# Altium PCB P10_ESP32.PcbDoc
Units mm, origin at the board's own origin, x right, y up, seen from the top; angles counter-clockwise.
Board outline 91.31 x 42.29 mm, 2 copper layers (Top Layer, Bottom Layer); 56 components, 39 nets, 174 pads, 40 vias.
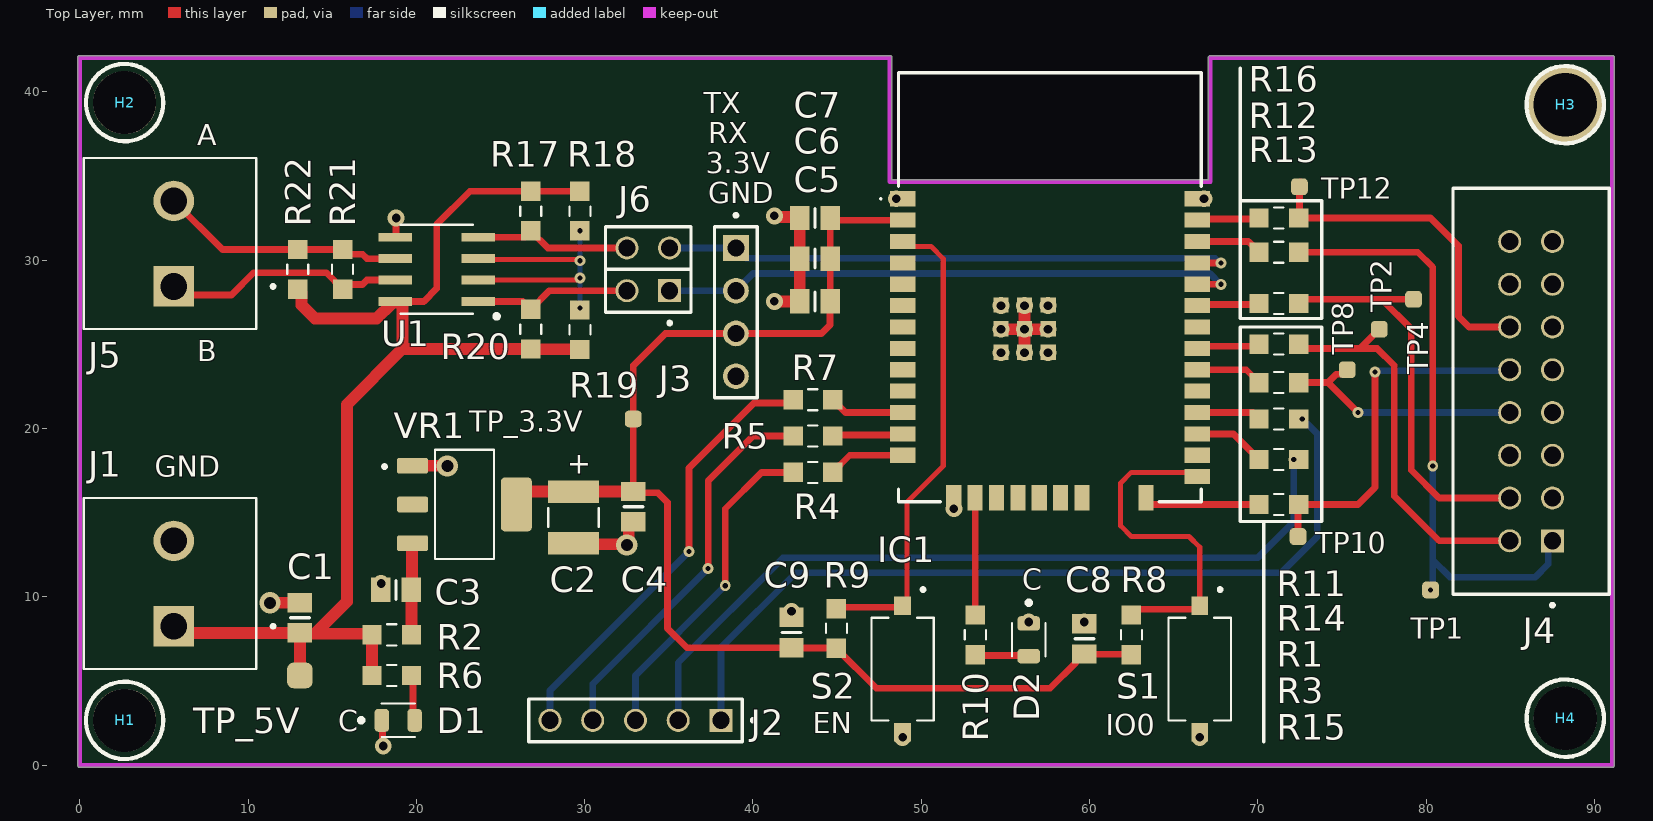
[diagram p0: Top Layer view]
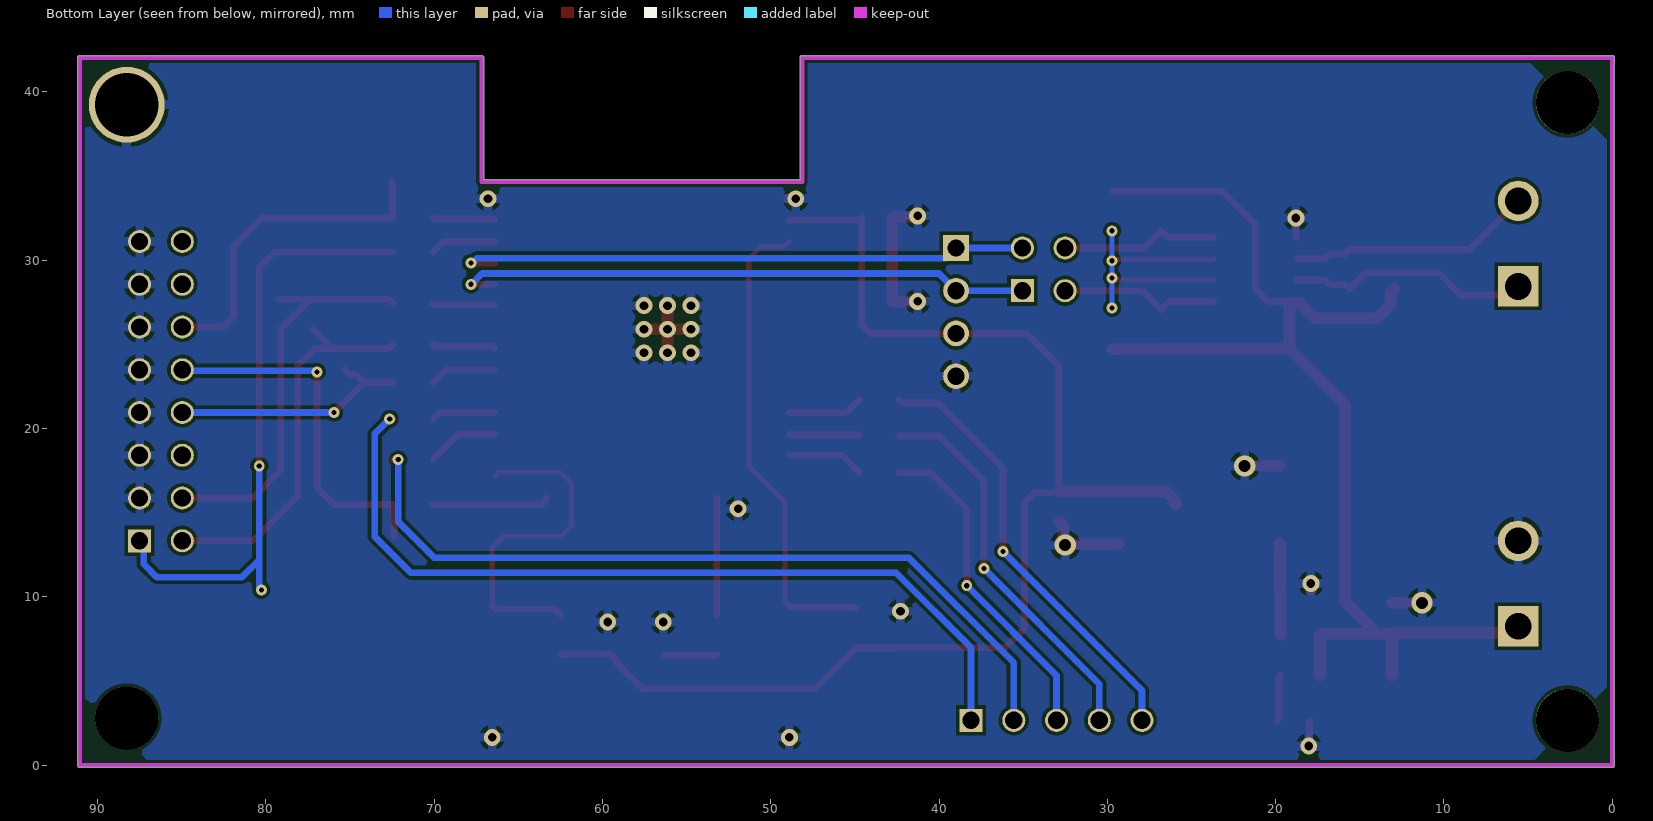
[diagram p1: Bottom Layer view, seen from below]
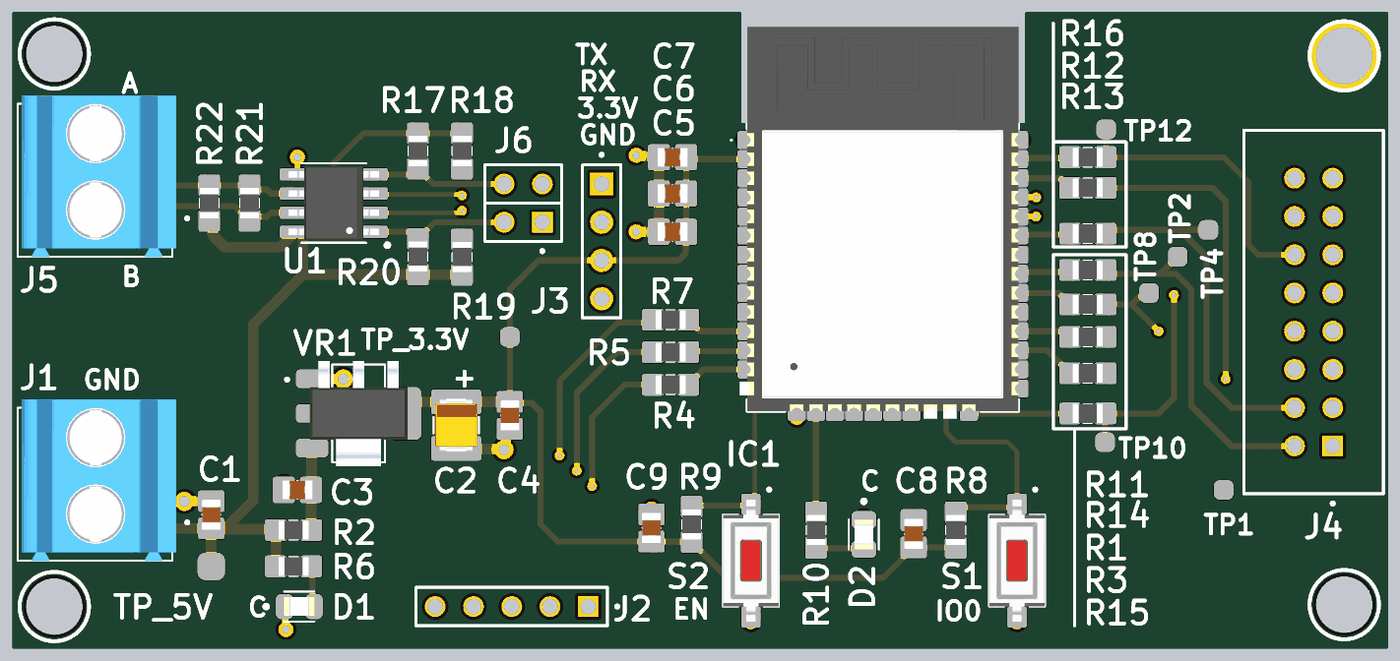
[diagram p2: 3D render of the assembled board from above, using the file's embedded part models]

## Layer stack, top to bottom
Top Solder: solder mask 0.0102, Solder Resist, Dk 3.5
Top Layer: signal copper 0.0356
Dielectric 1: dielectric 0.32, FR-4, Dk 4.8
Bottom Layer: signal copper 0.0356
Bottom Solder: solder mask 0.0102, Solder Resist, Dk 3.5

## Board outline
-0.125,0 -0.125,42.037 cw(c0,42.037) 0,42.162 48.133,42.162 cw(c48.133,42.037) 48.258,42.037 48.258,34.796 67.058,34.796 67.058,42.037 cw(c67.183,42.037) 67.183,42.162 91.059,42.162 cw(c91.059,42.037) 91.184,42.037 91.184,0 cw(c91.059,0) 91.059,-0.125 0,-0.125 cw(c0,0)

## Design rules (kind name [scope] priority, off if disabled: settings)
Clearance [All] p1: gap=0.2 ignorepadtopadclearanceinfootprint=FALSE
HoleSize [All] p1: absolutevalues=TRUE maxlimit=5.54 minlimit=0.25 maxpercent=80.000 minpercent=20.000
MinimumSolderMaskSliver [All] p1: minsoldermaskwidth=0.001
PasteMaskExpansion [All] p1: expansion=0.15
PlaneConnect [All] p1: planeconnectstyle=Relief reliefexpansion=0.508 reliefentries=4 reliefconductorwidth=0.54 reliefairgap=0.254
PolygonConnect [All] p1: connectstyle=Relief reliefconductorwidth=0.54 reliefentries=4 polygonreliefangle="90 Angle" airgapwidth=0.254
RoutingVias [All] p1: holewidth=0.711 width=1.27 viastyle="Through Hole" minholewidth=0.311 minwidth=0.627 maxholewidth=4.511 maxwidth=5
SilkToSilkClearance [All] p1: silktosilkclearance=0.025
SilkToSolderMaskClearance [IsPad] p1: minsilkscreentomaskgap=-0.25 clearancetoexposedcopper=TRUE
SolderMaskExpansion [All] p1: expansion=0.2 istentingtop=FALSE
SupplyNets "Schematic Supply Nets_2" [InNet('+3.3v')] p1: voltage=0.000
SupplyNets "Schematic Supply Nets_1" [InNet('GND')] p2: voltage=0.000
SupplyNets "Schematic Supply Nets" [InNet('+5')] p3: voltage=0.000
Width [All] p1: maxlimit=0.7 minlimit=0.3 preferedwidth=0.4
24 further rules are at their usual default settings.

## Classes and differential pairs
component class P10_ESP32: C1 C2 C3 C4 C5 C6 C7 C8 C9 D1 D2 IC1 J1 J2 J3 R1 R2 R3 R4 R5 R6 R7 R8 R9 R10 S1 S2 VR1
component class P10_ESP32_1: H1 H2 H3 H4 J4 J5 J6 R11 R12 R13 R14 R15 R16 R17 R18 R19 R20 R21 R22 TP1 TP2 TP10 TP12 TP_3.3V TP_5V U1

## Components (designator, comment, footprint, x,y, rotation, side; value= is the part's Value field where it differs from the comment)
C1 "CAP CER 10uF/50V 5% 0805" "CAP CER 0.1uF/50V 5%" 13.081,8.763 r270 top
C2 "TANT CAP 10uF/16V 5% 3528(B)" "TANT CAP 3528(B)" 29.337,14.716 r270 top
C3 "CAP CER 10uF/50V 5% 0805" "CAP CER 0.1uF/50V 5%" 18.796,10.414 r0 top
C4 "CAP CER 0.1uF/50V 5% 0805" "CAP CER 0.1uF/50V 5%" 32.893,15.367 r90 top
C5 "CAP CER 10uF/50V 5% 0805" "CAP CER 0.1uF/50V 5%" 43.688,27.559 r0 top
C6 "CAP CER 0.1uF/50V 5% 0805" "CAP CER 0.1uF/50V 5%" 43.688,30.099 r0 top
C7 "CAP CER 0.1uF/50V 5% 0805" "CAP CER 0.1uF/50V 5%" 43.688,32.512 r0 top
C8 "CAP CER 0.1uF/50V 5% 0805" "CAP CER 0.1uF/50V 5%" 59.69,7.504 r270 top
C9 "CAP CER 0.1uF/50V 5% 0805" "CAP CER 0.1uF/50V 5%" 42.291,7.885 r270 top
D1 "LED-0805" LED-0805 18.923,2.667 r0 top
D2 "LED-0805" LED-0805 56.388,7.452 r270 top
H1 "ScrewHole_3.75mmD" ScrewHole_3.75mmD#1 2.667,2.667 r0 top
H2 "ScrewHole_3.75mmD" ScrewHole_3.75mmD#1 2.667,39.37 r0 top
H3 "ScrewHole_3.75mmD" ScrewHole_3.75mmD#2 88.265,39.243 r0 top
H4 "ScrewHole_3.75mmD" ScrewHole_3.75mmD#1 88.265,2.794 r0 top
IC1 "ESP32-WROOM-32S" ESP32-WROOM-32S 57.645,28.395 r0 top
J1 "2 PIN Terminal Block Connector 5.08 mm" "2 PIN Terminal Block Connector 5.08 mm" 5.588,8.255 r90 top
J2 "BURGE 5 PIN 2.54mm" "BURGE 5 PIN" 33.02,2.667 r0 top
J3 "BURGE 4 PIN 2.54mm" "BURGE 4 PIN 2.54mm" 38.989,26.924 r270 top
J4 "BOX HEADER MALE 8X2 2.54mm" "BOX HEADER MALE 8X2 2.54mm" 87.503,13.335 r90 top
J5 "2 PIN Terminal Block Connector 5.08 mm" "2 PIN Terminal Block Connector 5.08 mm" 5.588,28.448 r90 top
J6 "BURGE 2X2 PIN" "BURGE 2X2 pin" 35.052,28.194 r90 top
R1 "RES 0805 0E/0.25W 5%" "RES 0805 10K/0.25W 5%" 71.247,20.574 r0 top
R2 "RES 0805 0E/0.25W 5%" "RES 0805 10K/0.25W 5%" 18.542,7.747 r0 top
R3 "RES 0805 0E/0.25W 5%" "RES 0805 10K/0.25W 5%" 71.247,18.161 r0 top
R4 "RES 0805 0E/0.25W 5%" "RES 0805 10K/0.25W 5%" 43.561,17.399 r180 top
R5 "RES 0805 0E/0.25W 5%" "RES 0805 10K/0.25W 5%" 43.561,19.558 r180 top
R6 "RES 0805 470E/0.25W 5%" "RES 0805 10K/0.25W 5%" 18.542,5.334 r180 top
R7 "RES 0805 0E/0.25W 5%" "RES 0805 10K/0.25W 5%" 43.561,21.717 r180 top
R8 "RES 0805 10K/0.25W 5%" "RES 0805 10K/0.25W 5%" 62.484,7.747 r90 top
R9 "RES 0805 10K/0.25W 5%" "RES 0805 10K/0.25W 5%" 44.958,8.128 r90 top
R10 "RES 0805 220E/0.25W 5%" "RES 0805 10K/0.25W 5%" 53.213,7.747 r90 top
R11 "RES 0805 0E/0.25W 5%" "RES 0805 10K/0.25W 5%" 71.247,25.019 r180 top
R12 "RES 0805 0E/0.25W 5%" "RES 0805 10K/0.25W 5%" 71.247,30.48 r0 top
R13 "RES 0805 0E/0.25W 5%" "RES 0805 10K/0.25W 5%" 71.247,27.432 r180 top
R14 "RES 0805 0E/0.25W 5%" "RES 0805 10K/0.25W 5%" 71.247,22.733 r180 top
R15 "RES 0805 0E/0.25W 5%" "RES 0805 10K/0.25W 5%" 71.247,15.494 r180 top
R16 "RES 0805 0E/0.25W 5%" "RES 0805 10K/0.25W 5%" 71.247,32.512 r180 top
R17 "RES 0805 10K/0.25W 5%" "RES 0805 10K/0.25W 5%" 26.797,32.925 r90 top
R18 "RES 0805 10K/0.25W 5%" "RES 0805 10K/0.25W 5%" 29.718,32.925 r90 top
R19 "RES 0805 10K/0.25W 5%" "RES 0805 10K/0.25W 5%" 29.718,25.876 r270 top
R20 "RES 0805 10K/0.25W 5%" "RES 0805 10K/0.25W 5%" 26.797,25.908 r270 top
R21 "RES 0805 120E/0.25W 5%" "RES 0805 10K/0.25W 5%" 15.621,29.464 r90 top
R22 "RES 0805 20K/0.25W 5%" "RES 0805 10K/0.25W 5%" 12.954,29.464 r90 top
S1 "PUSHBUTTON_SMD_6.1 x 3.7 mm, 2.5 mm" "PUSHBUTTON_SMD_6.1 x 3.7 mm, 2.5 mm" 66.548,5.715 r270 top
S2 "PUSHBUTTON_SMD_6.1 x 3.7 mm, 2.5 mm" "PUSHBUTTON_SMD_6.1 x 3.7 mm, 2.5 mm" 48.895,5.715 r270 top
TP1 "Touch Points 1mm" "Touch Points 1mm"#1 80.264,10.414 r90 top (schematic designator TP4)
TP2 "Touch Points 1mm" "Touch Points 1mm"#1 77.216,25.908 r0 top (schematic designator TP1)
TP4 "Touch Points 1mm" "Touch Points 1mm"#1 79.248,27.686 r90 top (schematic designator TP3)
TP8 "Touch Points 1mm" "Touch Points 1mm"#1 75.311,23.495 r90 top (schematic designator TP5)
TP10 "Touch Points 1mm" "Touch Points 1mm"#1 72.39,13.589 r90 top (schematic designator TP7)
TP12 "Touch Points 1mm" "Touch Points 1mm"#1 72.469,34.369 r90 top (schematic designator TP2)
TP_3.3V "Touch Points 1mm" "Touch Points 1mm"#1 32.893,20.574 r90 top (schematic designator TP8)
TP_5V "Touch Points 1mm" "Touch Points 1mm"#2 13.081,5.334 r90 top (schematic designator TP6)
U1 "MAX485CSA SOIC-8" MAX485CSA 21.209,29.464 r180 top
VR1 "LM1117IMPX-3.3V SOT-223" "LM1117IMPX-3.3V SOT-223" 22.86,15.494 r0 top

## Footprints (in the part's own frame and the unit in brackets; to place one, negate y for a bottom-side part, rotate by r counter-clockwise, add the part's x,y. Pads: shape width x height; smd on the part's side, far side on the other; paste and mask are expansions set on the pad)
"2 PIN Terminal Block Connector 5.08 mm" [mm]
  rect 2.4x2.4 / inner round 2.4 / far side rect 2.4x2.4 hole 1.6: 1(0,0)
  round 2.4 hole 1.6: 2(5.08,0)
  silkscreen extent -2.54,-6 7.62,5.35, body extent -2.59,-5.17 8.17,5.08, height 14
"BOX HEADER MALE 8X2 2.54mm" [mm] "BOX HEADER MALE 8X2 2.54mm 16 pin"
  rect 1.37x1.37 hole 1.02: 01(0,0)
  round 1.37 hole 1.02: 02(0,2.54) 03(2.54,0) 04(2.54,2.54) 05(5.08,0) 06(5.08,2.54) 07(7.62,0) 08(7.62,2.54) 09(10.16,0) 10(10.16,2.54) 11(12.7,0) 12(12.7,2.54) 13(15.24,0) 14(15.24,2.54) 15(17.78,0) 16(17.78,2.54)
  silkscreen extent -3.92,-3.36 20.95,5.9
"BURGE 2X2 pin" [mm] "Connector Header Through Hole 4 position 0.100 (2.54mm), 4X2 PIN"
  rect 1.37x1.37 hole 1.02: 01(0,0)
  round 1.37 hole 1.02: 02(0,2.54) 03(2.54,0) 04(2.54,2.54)
  silkscreen extent -2.02,-1.27 3.81,3.81
"BURGE 4 PIN 2.54mm" [mm] "BURGE 4 PIN 2.54mm TSW-104-X-X-S-LL"
  rect 1.53x1.53 / inner round 1.53 / far side rect 1.53x1.53 hole 1.02: 01(-3.81,0)
  round 1.53 hole 1.02: 02(-1.27,0) 03(1.27,0) 04(3.81,0)
  silkscreen extent -5.85,-1.27 5.08,1.27
"BURGE 5 PIN" [mm] "MTSW-105-07-T-S-048 BURGE 5 PIN 2.54mm"
  rect 1.37x1.37 hole 1.02: 01(5.08,0)
  round 1.37 hole 1.02: 02(2.54,0) 03(0,0) 04(-2.54,0) 05(-5.08,0)
  silkscreen extent -6.35,-1.27 7.1,1.27
"CAP CER 0.1uF/50V 5%" [mm]
  rect 1.15x1.45 smd: 1(-0.9,0) 2(0.9,0)
  silkscreen extent 0,-0.55 0,0.55, body extent -1,-0.63 1,0.63, height 1.35
ESP32-WROOM-32S [mm] "ESP32-WROOM-32S, Bluetooth, WiFi 802.11b/g/n, Bluetooth v4.2 +EDR, Class 1, 2 and 3 Transceiver Module 2.4GHz ~ 2.5GHz PCB Trace Surface Mount"
  rect 1.5x0.9 smd: 1(-8.75,5.26) 2(-8.75,3.99) 3(-8.75,2.72) 4(-8.75,1.45) 5(-8.75,0.18) 6(-8.75,-1.09) 7(-8.75,-2.36) 8(-8.75,-3.63) 9(-8.75,-4.9) 10(-8.75,-6.17) 11(-8.75,-7.44) 12(-8.75,-8.71) 13(-8.75,-9.98) 25(8.75,-11.25) 26(8.75,-9.98) 27(8.75,-8.71) 28(8.75,-7.44) 29(8.75,-6.17) 30(8.75,-4.9) 31(8.75,-3.63) 32(8.75,-2.36) 33(8.75,-1.09) 34(8.75,0.18) 35(8.75,1.45) 36(8.75,2.72) 37(8.75,3.99) 38(8.75,5.26)
  rect 1.5x0.9 on Top Overlay: 14(-8.75,-11.25)
  rect 0.9x1.5 smd: 15(-5.715,-12.5) 16(-4.445,-12.5) 17(-3.175,-12.5) 18(-1.905,-12.5) 19(-0.635,-12.5) 20(0.635,-12.5) 21(1.905,-12.5) 24(5.715,-12.5)
  rect 0.9x1.5 on Top Overlay: 22(3.175,-12.5) 23(4.445,-12.5)
  rect 0.9x0.9 smd: 39(-2.9,-1.06) 40(-2.9,-2.46) 41(-2.9,-3.86) 42(-1.5,-3.86) 43(-0.1,-3.86) 44(-0.1,-2.46) 45(-0.1,-1.06) 46(-1.5,-1.06) 47(-1.5,-2.46)
  silkscreen extent -10.1,-12.75 9,12.75, body extent -9,-12.75 9,12.75, height 3.25
LED-0805 [mm] "Red 640nm LED Indication - Discrete 1.85V 0805 (2012 Metric) APT2012SRCPRV"
  rrect50% 0.86x1.36 smd: A(0.975,0) C(-0.975,0)
  silkscreen extent -2.3,-0.99 1,0.99, body extent -1,-0.63 1,0.63, height 0.75
"LM1117IMPX-3.3V SOT-223" [mm] "LM1117IMPX-3.3V 800-mA 15-V linear voltage regulator SOT230P700X180-4N"
  rrect25% 1.84x0.93 smd: 1(-3.085,2.3) 2(-3.085,0) 3(-3.085,-2.3)
  rrect25% 1.84x3.19 smd: 4(3.085,0)
  silkscreen extent -4.85,-3.25 1.75,3.25, body extent -3.5,-3.25 3.5,3.25, height 1.8
MAX485CSA [mil] "MAX485CSA-RS-485/RS-422 Transceivers, SOIC-8"
  rect 78x21 smd: 1(-97,75) 2(-97,25) 3(-97,-25) 4(-97,-75) 5(97,-75) 6(97,-25) 7(97,25) 8(97,75)
  silkscreen extent -145,-104 84,115, body extent -118,-96 118,96, height 69
"PUSHBUTTON_SMD_6.1 x 3.7 mm, 2.5 mm" [mm] "6.1 x 3.7 mm, 2.5 mm Actuator Height, 260 gf, Red, Surface Mount, SPST, Tactile Switch, TS09-63-25-R-260-SMT-TR"
  rect 1.1x1 smd: 1(-3.75,0) 2(3.75,0)
  silkscreen extent -4.82,-1.85 3.05,1.85, body extent -4.05,-1.85 4.05,1.85, height 2.5
"RES 0805 10K/0.25W 5%" [mm] "RESISTOR, THICK FILM, 10K, 5%, 0805, FRESISTOR, THICK FILM, 10K, 5%, 0805, FULL REEL Product Range:PANASONIC - ERJ Series"
  rect 1.15x1.15 smd: 1(-1.175,0) 2(1.175,0)
  silkscreen extent -0.28,-0.63 0.28,0.63, body extent -1,-0.63 1,0.63, height 0.7
ScrewHole_3.75mmD#1 [mm] "SCREW HEAD DIA 4.5MM, SREW LEG DIA 3 MM"
  round 3.75 hole 3.75 unplated: 1(0,0)
  silkscreen extent -2.3,-2.3 2.3,2.3
ScrewHole_3.75mmD#2 [mm] "SCREW HEAD DIA 4.5MM, SREW LEG DIA 3 MM"
  round 4.5 hole 3.75: 1(0,0)
  silkscreen extent -2.3,-2.3 2.3,2.3
"TANT CAP 3528(B)" [mm] "10 ÂµF Molded Tantalum Polymer Capacitor 25 V 1411 (3528 Metric), 1210 150mOhm TCJB106M025R0150"
  rect 1.34x3.02 smd: 1(-1.54,0) 2(1.54,0)
  silkscreen extent -0.55,-1.5 0.55,1.5, body extent -1.75,-1.4 1.75,1.4, height 2.1
"Touch Points 1mm"#1 [mm] "Touch Points 0.75mm to1mm"
  rrect50% 1x1 smd: 1(0,0)
"Touch Points 1mm"#2 [mm] "Touch Points 0.75mm to1mm"
  rrect50% 1.524x1.524 smd: 1(0,0)

## Part data
C1 C3 C4 C5 C6 C7 C8 C9: library part "CAP CER 0.1uF/50V 5%", "CAP CER 0.1uF/50V  Ceramic Capacitor X7R 0805 (2012 Metric)", Package="0805 Samsung", Check_prices=https://www.snapeda.com/parts/CL21B104KCFNNNE/Samsung+Electro-Mechanics/view-part/?ref=eda, Digi-Key_Part_Number=1276-6840-2-ND, MF=Samsung, MP=CL21B104KCFNNNE, Purchase-URL=https://pricing.snapeda.com/search?q=CL21B104KCFNNNE&ref=eda, SnapEDA_Link=https://www.snapeda.com/parts/CL21B104KCFNNNE/Samsung+Electro-Mechanics/view-part/?ref=snap
C2: "10 ÂµF Molded Tantalum Polymer Capacitor 25 V 1411 (3528 Metric), 1210 150mOhm TCJB106M025R0150", Package="1210 AVX", Check_prices=https://www.snapeda.com/parts/TCJB106M025R0150/AVX/view-part/?ref=eda, MF=AVX, MP=TCJB106M025R0150, SnapEDA_Link=https://www.snapeda.com/parts/TCJB106M025R0150/AVX/view-part/?ref=snap
D1 D2: "Red 640nm LED Indication - Discrete 1.85V 0805 (2012 Metric) APT2012SRCPRV", Package="0805 Kingbright", Check_prices=https://www.snapeda.com/parts/APT2012SRCPRV/Kingbright/view-part/?ref=eda, MF=Kingbright, MP=APT2012SRCPRV, SnapEDA_Link=https://www.snapeda.com/parts/APT2012SRCPRV/Kingbright/view-part/?ref=snap
H1 H2 H3 H4: "SCREW HEAD DIA 4.5MM, SREW LEG DIA 3 MM"
IC1: "Bluetooth, WiFi 802.11b/g/n, Bluetooth v4.2 +EDR, Class 1, 2 and 3 Transceiver Module 2.4GHz ~ 2.5GHz PCB Trace Surface Mount", Package="SMD-44 Espressif Systems", Check_prices=https://www.snapeda.com/parts/ESP32-WROOM-32E-N8/Espressif+Systems/view-part/?ref=eda, MF="Espressif Systems", MP=ESP32-WROOM-32E-N8, SnapEDA_Link=https://www.snapeda.com/parts/ESP32-WROOM-32E-N8/Espressif+Systems/view-part/?ref=snap
J1 J5: "MOLEX,Screw Type, Horizontal, 5.08 Pitch, 24~12 (AWG), Terminal Block Connector, TB007-508-02BE", Package=None, Check_prices=https://www.snapeda.com/parts/TB007-508-02BE/Same+Sky/view-part/?ref=eda, MF="Same Sky", MP=TB007-508-02BE, SnapEDA_Link=https://www.snapeda.com/parts/TB007-508-02BE/Same+Sky/view-part/?ref=snap
J2: library part "BURGE 5 PIN", "MTSW-105-07-T-S-048 BURGE 5 PIN 2.54mm", Package=None, Availability=Unavailable, MP=MTSW-105-07-T-S-048, Price=None
J3: "Conn Unshrouded Header HDR 4 POS 2.54mm Solder ST Top Entry Thru-Hole Bulk TSW-104-17-G-S-LL", Package=None, Check_prices=https://www.snapeda.com/parts/TSW-104-23-H-S-LL/Samtec/view-part/?ref=eda, MF=Samtec, MP=TSW-104-23-H-S-LL, SnapEDA_Link=https://www.snapeda.com/parts/TSW-104-23-H-S-LL/Samtec/view-part/?ref=snap
J4: "BOX HEADER MALE 8X2 2.54mm 16 pin", Package=None, Availability=Unavailable, MP=TSS-108-01-T-D, Price=None
J6: library part "4PIN BURGE", "Connector Header Through Hole 4 position 0.100 (2.54mm), 2X2 PIN", Package=None, Check_prices=https://www.snapeda.com/parts/MTLW-102-05-G-D-180/Samtec/view-part/?ref=eda, MF=Samtec, MP=MTLW-102-05-G-D-180, SnapEDA_Link=https://www.snapeda.com/parts/MTLW-102-05-G-D-180/Samtec/view-part/?ref=snap
R1 R2 R3 R4 R5 R6 R7 R10 R11 R12 R13 R14 R15 R16 R21 R22: library part "RES 0805 10K/0.25W 5%", "RESISTOR, THICK FILM, 10K, 5%, 0805, FRESISTOR, THICK FILM, 10K, 5%, 0805, FULL REEL Product Range:PANASONIC - ERJ Series", Package="805-2 Panasonic", Availability="In Stock", Check_prices=https://www.snapeda.com/parts/ERJ-6GEYJ103V/Panasonic+Electronic+Components/view-part/?ref=eda, MF="Panasonic Electronic", MP=ERJ-6GEYJ103V, Price=None, Purchase-URL=https://pricing.snapeda.com/search/part/ERJ-6GEYJ103V/?ref=eda, SnapEDA_Link=https://www.snapeda.com/parts/ERJ-6GEYJ103V/Panasonic+Electronic+Components/view-part/?ref=snap
R8 R9 R17 R18 R19 R20: "RESISTOR, THICK FILM, 10K, 5%, 0805, FRESISTOR, THICK FILM, 10K, 5%, 0805, FULL REEL Product Range:PANASONIC - ERJ Series", Package="805-2 Panasonic", Availability="In Stock", Check_prices=https://www.snapeda.com/parts/ERJ-6GEYJ103V/Panasonic+Electronic+Components/view-part/?ref=eda, MF="Panasonic Electronic", MP=ERJ-6GEYJ103V, Price=None, Purchase-URL=https://pricing.snapeda.com/search/part/ERJ-6GEYJ103V/?ref=eda, SnapEDA_Link=https://www.snapeda.com/parts/ERJ-6GEYJ103V/Panasonic+Electronic+Components/view-part/?ref=snap
S1 S2: "6.1 x 3.7 mm, 2.5 mm Actuator Height, 260 gf, Red, Surface Mount, SPST, Tactile Switch, TS09-63-25-R-260-SMT-TR", Package=None, Check_prices=https://www.snapeda.com/parts/TS09-63-25-R-260-SMT-TR/Same+Sky/view-part/?ref=eda, MF="Same Sky", MP=TS09-63-25-R-260-SMT-TR, SnapEDA_Link=https://www.snapeda.com/parts/TS09-63-25-R-260-SMT-TR/Same+Sky/view-part/?ref=snap
TP1 TP2 TP4 TP8 TP10 TP12 TP_3.3V TP_5V: library part "Touch Points", "Touch Points 0.75mm to1mm"
U1: library part MAX485CSA, "MAX485CSA-RS-485/RS-422 Transceivers, SOIC-8", Package="SOIC-8 Maxim", Check_prices=https://www.snapeda.com/parts/MAX485CSA+/Analog+Devices/view-part/?ref=eda, MF="Analog Devices", MP=MAX485CSA+, SnapEDA_Link=https://www.snapeda.com/parts/MAX485CSA+/Analog+Devices/view-part/?ref=snap
VR1: "LM1117IMPX-3.3V 800-mA 15-V linear voltage regulator SOT-223", Package="SOT-223-4 Texas Instruments", Check_prices=https://www.snapeda.com/parts/LM1117IMPX-5.0/NOPB/Texas+Instruments/view-part/?ref=eda, MF="Texas Instruments", MP=LM1117IMPX-5.0/NOPB, SnapEDA_Link=https://www.snapeda.com/parts/LM1117IMPX-5.0/NOPB/Texas+Instruments/view-part/?ref=snap

## Via types
v1: diameter 1, hole 0.511, Top Layer to Bottom Layer, 22 vias
v2: diameter 0.65, hole 0.311, Top Layer to Bottom Layer, 15 vias
v3: diameter 1.27, hole 0.711, Top Layer to Bottom Layer, 3 vias

## Nets (pads, with @x,y where several pads share a name; then routed paths per layer and width w, separated by ;. In a path a pad name is that pad's centre, name@x,y a point inside that pad or via, vN(x,y) a via of type N, cw(c..) or ccw(c..) an arc to the next point about the centre after c; other vN are vias at no path point)
+3.3v: C2.1 C4.2 C5.2 C6.2 C7.2 C8.2 C9.2 IC1.2 J3.03 R8.1 R9.1 TP_3.3V.1 VR1.4 | length 78
  Top Layer w0.4: IC1.2 44.715,32.385 C7.2 C6.2 C5.2 44.577,27.548 44.577,26.162 44.069,25.654 J3.03 34.798,25.654 32.893,23.749 C4.2 32.979,16.181 34.365,16.181 34.925,15.621 34.925,8.128 36.068,6.985 C9.2 42.307,6.969 44.942,6.969 47.339,4.572 57.658,4.572 59.165,6.079 59.165,6.229 59.54,6.604 C8.2 59.706,6.588 62.468,6.588 R8.1
  Top Layer w0.7: VR1.4 25.945,15.686 26.515,16.256 C2.1 29.343,16.262 32.888,16.262 C4.2
+5: C1.2 J1.1 R2.1 R6.2 R17.2 R18.2 R19.2 R20.2 R22.1 TP_5V.1 U1.8 | length 72.7
  Top Layer w0.4: U1.8 20.447,27.559 21.209,28.321 21.209,32.131 23.178,34.1 R17.2 R18.2
  Top Layer w0.7: J1.1 5.98,7.863 C1.2 ; R22.1 13.179,28.064 13.179,27.334 13.97,26.543 17.653,26.543 U1.8@18.542,27.432 ; TP_5V.1 C1.2 ; R6.2 R2.1 17.309,7.805 13.97,7.805 ; U1.8@18.829,27.476 19.177,27.476 19.177,24.733 ; R19.2 29.702,24.717 26.813,24.717 R20.2 19.177,24.733 ; C1.2 13.139,7.805 13.97,7.805 ; 13.97,7.805 15.875,9.71 15.875,21.431 19.177,24.733
D2/GPIO2: IC1.24 R15.2 | length 7
  Top Layer w0.4: IC1.24 63.36,15.744 63.61,15.494 R15.2
D13/GPIO13: IC1.16 R10.2 | length 7
  Top Layer w0.4: IC1.16 53.207,15.889 53.207,8.928 R10.2
D14/GPIO14: IC1.13 R4.1 | length 4.6
  Top Layer w0.4: R4.1 45.752,18.415 IC1.13
D16/GPIO16: IC1.27 R3.1 | length 4.3
  Top Layer w0.4: IC1.27 68.548,19.685 R3.1
D17/GPIO17: IC1.28 R1.1 | length 3.8
  Top Layer w0.4: IC1.28 69.691,20.955 R1.1
D18/GPIO18: IC1.30 R14.2 | length 4
  Top Layer w0.4: IC1.30 69.31,23.495 R14.2
D19/GPIO19: IC1.31 R11.2 | length 3.8
  Top Layer w0.4: IC1.31 66.522,24.892 69.945,24.892 R11.2
D21/GPIO21: IC1.33 R13.2 | length 3.7
  Top Layer w0.4: IC1.33 66.459,27.368 70.009,27.368 R13.2
D22/GPIO22: IC1.36 R12.1 | length 3.9
  Top Layer w0.4: IC1.36 69.437,31.115 R12.1
D23/GPIO23: IC1.37 R16.2 | length 3.7
  Top Layer w0.4: IC1.37 66.459,32.448 70.009,32.448 R16.2
D26/GPIO26: IC1.11 R7.1 | length 4.5
  Top Layer w0.4: R7.1 45.498,20.955 IC1.11
D27/GPIO27: IC1.12 R5.1 | length 4.2
  Top Layer w0.4: R5.1 44.799,19.621 48.831,19.621 IC1.12
EN: IC1.3 R9.2 S2.1 | length 28.5
  Top Layer w0.3: S2.1 49.149,9.719 49.149,15.621 51.308,17.78 51.308,30.099 50.592,30.815 49.195,30.815 IC1.3
  Top Layer w0.4: R9.2 45.039,9.384 48.814,9.384 S2.1
EN1: R18.1 R19.1 U1.2 U1.3 | length 16.8
  Top Layer w0.3: U1.2 29.496,28.829 29.623,28.956 v2(29.718,28.956) ; U1.3 23.736,30.035 29.654,30.035 v2(29.718,29.972)
  Bottom Layer w0.3: v2(29.718,27.173) v2(29.718,31.75)
GND: C1.1 C2.2 C3.1 C4.1 C5.1 C6.1 C7.1 C8.1 C9.1 D1.C D2.C H3.1 IC1.1 IC1.15 IC1.38 IC1.39 IC1.40 IC1.41 IC1.42 IC1.43 IC1.44 IC1.45 IC1.46 IC1.47 J1.2 J3.04 J4.03 J4.05 J4.07 J4.09 J4.11 J4.13 J4.15 S1.2 S2.2 U1.5 VR1.1 | length 25.8
  Top Layer w0.4: D1.C 17.991,2.624 17.991,1.186 v1(18.034,1.143) ; U1.5 18.796,31.42 v1(18.796,32.512)
  Top Layer w0.7: v3(11.303,9.652) 11.309,9.658 13.076,9.658 C1.1 ; C3.1 17.896,10.784 v1(17.907,10.795) ; VR1.1 19.782,17.787 21.837,17.787 v3(21.844,17.78) ; C2.2 29.385,13.129 32.464,13.129 v3(32.512,13.081) 32.621,13.19 32.621,14.242 32.846,14.467 C4.1 ; v1(41.275,27.559) C5.1 C6.1 C7.1 42.724,32.575 41.338,32.575 v1(41.275,32.639) ; v1(48.514,33.655) IC1.1 ; v1(54.737,25.908) v1(56.134,25.908) ; v1(56.134,24.511) v1(56.134,25.908) ; v1(56.134,27.305) v1(56.134,25.908) ; v1(57.531,25.908) v1(56.134,25.908)
  other v1: 48.895,1.651 66.548,1.651 56.388,8.509 59.69,8.509 42.291,9.144 51.943,15.24 54.737,24.511 57.531,24.511 54.737,27.305 57.531,27.305 66.802,33.655
IO0: IC1.25 R8.2 S1.1 | length 20.5
  Top Layer w0.3: IC1.25 66.141,17.399 62.484,17.399 61.849,16.764 61.849,14.224 62.484,13.589 65.913,13.589 66.548,12.954 S1.1
  Top Layer w0.4: R8.2 62.833,9.271 66.354,9.271 S1.1
NetC3_2: C3.2 R2.2 VR1.3 | length 5.5
  Top Layer w0.7: R2.2 19.707,7.757 19.707,10.403 C3.2 19.736,10.453 19.736,13.154 VR1.3
NetD1_A: D1.A R6.1 | length 2.7
  Top Layer w0.4: R6.1 19.807,5.243 19.807,2.758 D1.A
NetD2_A: D2.A R10.1 | length 3.2
  Top Layer w0.4: R10.1 53.261,6.525 56.34,6.525 D2.A
NetIC1_17: 
NetJ2_01: J2.01 R1.2 | length 50.1
  Top Layer w0.4: R1.2 v2(72.644,20.574)
  Bottom Layer w0.4: J2.01 38.1,6.985 42.545,11.43 71.374,11.43 73.533,13.589 73.533,19.685 v2(72.644,20.574)
NetJ2_02: J2.02 R3.2 | length 47.4
  Top Layer w0.4: v2(72.136,18.161) R3.2
  Bottom Layer w0.4: J2.02 35.56,6.096 41.783,12.319 69.977,12.319 72.136,14.478 v2(72.136,18.161)
NetJ2_03: J2.03 R4.2 | length 19.7
  Top Layer w0.4: v2(38.354,10.668) 38.354,15.24 40.513,17.399 R4.2
  Bottom Layer w0.4: J2.03 33.02,5.334 v2(38.354,10.668)
NetJ2_04: J2.04 R5.2 | length 23.2
  Top Layer w0.4: v2(37.338,11.684) 37.338,16.891 40.005,19.558 R5.2
  Bottom Layer w0.4: J2.04 30.48,4.826 v2(37.338,11.684)
NetJ2_05: J2.05 R7.2 | length 26.3
  Top Layer w0.4: v2(36.195,12.7) 36.195,17.653 40.059,21.517 42.186,21.517 R7.2
  Bottom Layer w0.4: J2.05 27.94,4.445 v2(36.195,12.7)
NetJ4_01: J4.01 R12.2 TP1.1 | length 36.5
  Top Layer w0.4: R12.2 79.502,30.48 80.391,29.591 v2(80.391,17.78)
  Bottom Layer w0.4: v2@80.391,10.541 80.391,12.192 ; v2(80.391,17.78) 80.391,12.192 ; J4.01 87.249,13.081 87.249,11.938 86.487,11.176 81.407,11.176 80.391,12.192
  other v2: 80.264,10.414
NetJ4_02: J4.02 R11.1 TP2.1 | length 23.5
  Top Layer w0.4: R11.1 72.676,24.765 76.073,24.765 ; TP2.1 76.073,24.765 ; J4.02 80.772,13.335 78.105,16.002 78.105,23.749 77.089,24.765 76.073,24.765
NetJ4_04: J4.04 R13.1 TP4.1 | length 24.4
  Top Layer w0.4: R13.1 72.676,27.686 77.343,27.686 ; TP4.1 77.343,27.686 ; J4.04 80.772,15.875 79.121,17.526 79.121,25.908 77.343,27.686
NetJ4_08: J4.08 R14.1 TP8.1 | length 14.7
  Top Layer w0.4: R14.1 74.168,22.733 ; TP8.1 75.05,23.234 74.669,23.234 74.168,22.733 ; v2(75.946,20.955) 74.168,22.733
  Bottom Layer w0.4: v2(75.946,20.955) J4.08
NetJ4_10: J4.10 R15.1 TP10.1 | length 21.8
  Top Layer w0.4: TP10.1 72.39,15.462 R15.1 75.946,15.494 76.962,16.51 v2(76.962,23.368)
  Bottom Layer w0.4: v2(76.962,23.368) 77.025,23.431 84.9,23.431 J4.10
NetJ4_12: J4.12 R16.1 TP12.1 | length 19.9
  Top Layer w0.4: TP12.1@72.517,34.671 72.517,34.417 TP12.1 72.469,32.56 R16.1 80.264,32.512 81.915,30.861 81.915,26.67 82.55,26.035 J4.12
NetJ5_1: J5.1 R21.1 U1.7 | length 14.5
  Top Layer w0.4: J5.1 6.096,27.94 9.017,27.94 10.341,29.264 14.646,29.264 R21.1 15.899,28.567 16.796,28.567 17.058,28.829 U1.7
NetJ5_2: J5.2 R21.2 R22.2 U1.6 | length 14.6
  Top Layer w0.4: J5.2 8.477,30.639 R21.2 15.899,30.361 16.796,30.361 17.058,30.099 U1.6
RX: IC1.34 J3.02 J6.01 | length 34.9
  Top Layer w0.4: IC1.34 v2(67.818,28.575)
  Bottom Layer w0.4: J6.01 J3.02 40.005,29.21 67.145,29.21 67.78,28.575 v2(67.818,28.575)
RX1: J6.02 R20.1 U1.1 | length 9.5
  Top Layer w0.4: U1.1 26.321,27.559 R20.1 27.908,28.194 J6.02
TX: IC1.35 J3.01 J6.03 | length 34.6
  Top Layer w0.4: IC1.35 v2(67.818,29.845)
  Bottom Layer w0.4: J6.03 J3.01 39.604,30.119 67.467,30.119 67.741,29.845 v2(67.818,29.845)
TX1: J6.04 R17.1 U1.4 | length 9.4
  Top Layer w0.4: U1.4 26.416,31.369 R17.1 27.813,30.734 J6.04
pads on no net: H1.1 H2.1 H4.1 IC1.4 IC1.5 IC1.6 IC1.7 IC1.8 IC1.9 IC1.10 IC1.14 IC1.17 IC1.18 IC1.19 IC1.20 IC1.21 IC1.22 IC1.23 IC1.26 IC1.29 IC1.32 J4.06 J4.14 J4.16 VR1.2

## Polygon pours and split planes (outlines as drawn)
GND on Bottom Layer "GND_L02_P000" (solid, pour order 0): 4.953,0 86.741,0 91.059,4.318 91.059,42.037 67.183,42.037 67.183,34.671 48.133,34.671 48.133,42.037 5.08,42.037 5.08,41.91 0,36.83 0,4.953

## Keep-outs
Keep-Out Layer:
  lines w0.25: 0,0 0,42.037 48.133,42.037 48.133,34.671 67.183,34.671 67.183,42.037 91.059,42.037 91.059,0 0,0

## Silkscreen, mask and mechanical layers (free items; w line width, h text height)
Top Overlay:
  lines w0.2: 31.242,29.464 36.322,29.464 ; 68.961,41.402 68.961,33.528 ; 69.088,14.478 70.824,14.478 70.358,14.478 70.358,1.397 ; 68.961,33.528 68.961,26.543 73.787,26.543 73.787,33.528 68.961,33.528 ; 68.961,14.478 68.961,26.035 73.787,26.035 73.787,14.478 68.961,14.478
  text "TX" at 37.084,38.735 h1.24
  text "RX" at 37.338,36.957 h1.24
  text "A" at 6.985,36.83 h1.24
  text "3.3V" at 37.211,35.179 h1.24
  text "GND" at 37.338,33.401 h1.24
  text "B" at 6.985,24.003 h1.24
  text "+" at 28.956,17.319 h1.24
  text "GND" at 4.445,17.145 h1.24
  text "C" at 56.007,10.414 h1.24
  text "C" at 15.367,2.032 h1.24
  text "EN" at 43.561,1.905 h1.24
  text "IO0" at 60.96,1.778 h1.24